# Altium PCB converter pcb.PcbDoc
Units mm, origin at the board's own origin, x right, y up, seen from the top; angles counter-clockwise.
Board outline 72 x 37 mm, 4 copper layers (Top Layer, Inner_GND, Inner_PWR, Bottom Layer), stack 1.471 mm thick; 21 components, 14 nets, 66 pads, 9 vias.
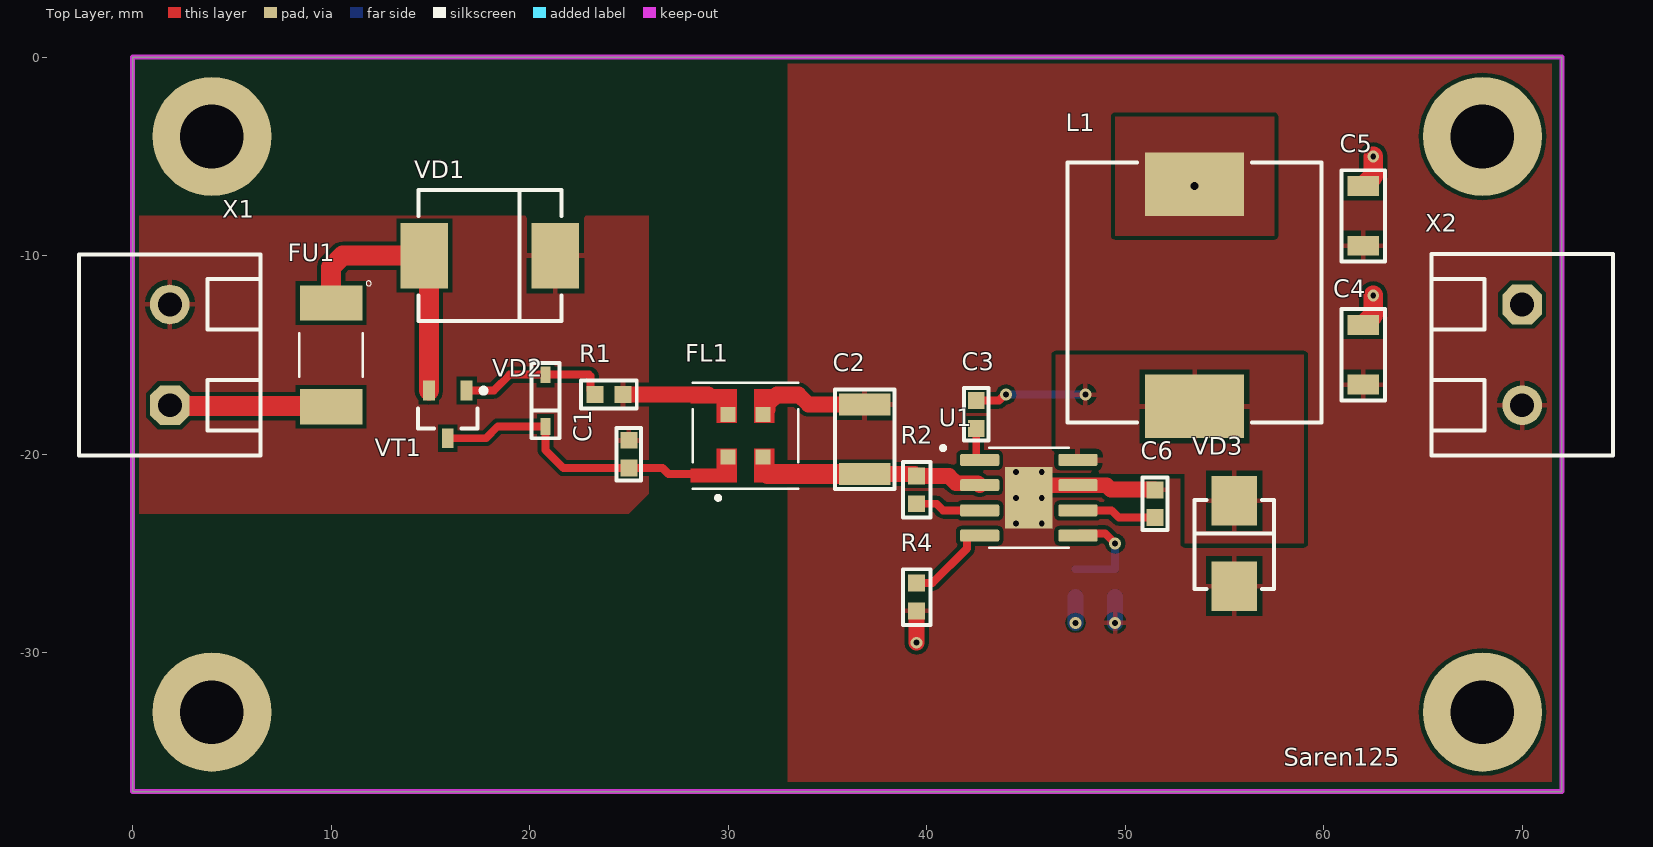
[diagram p0: Top Layer view]
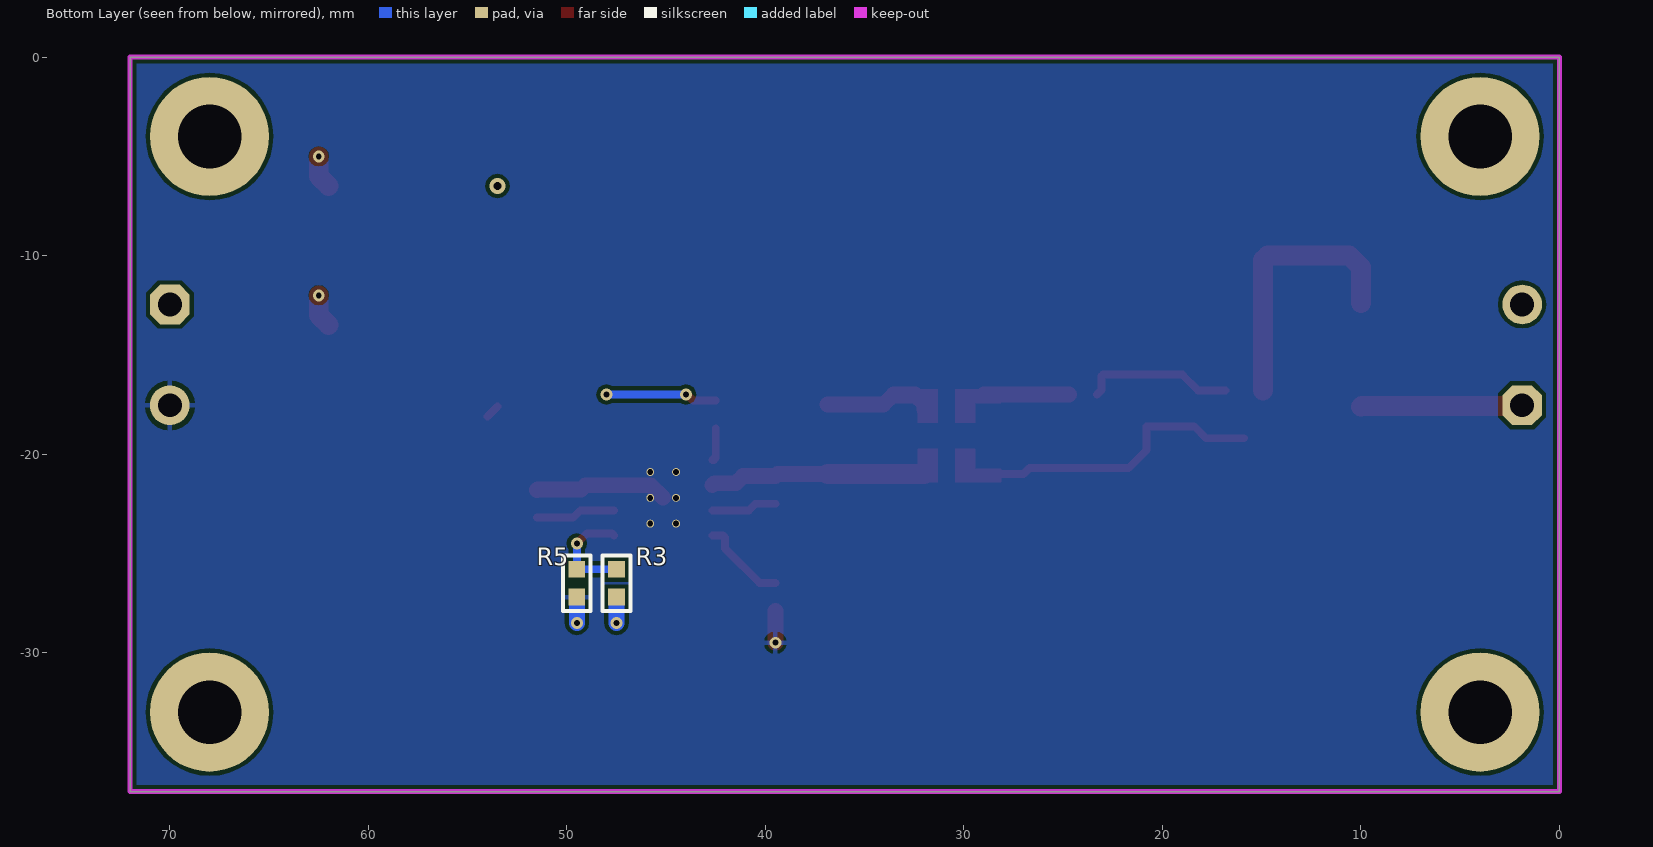
[diagram p1: Bottom Layer view, seen from below]
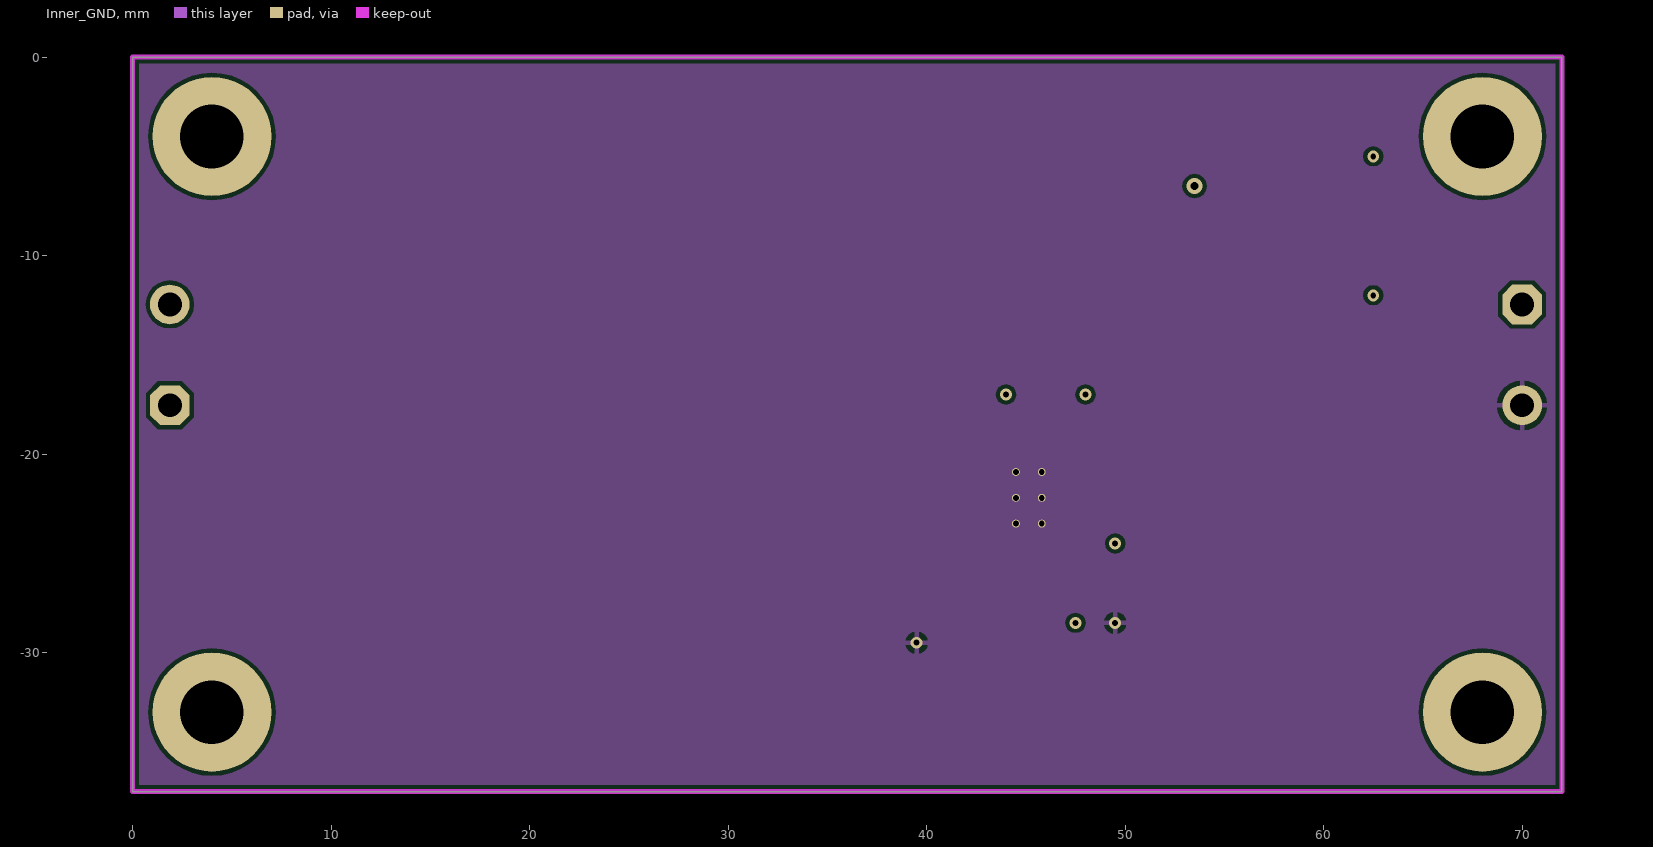
[diagram p2: Inner_GND]
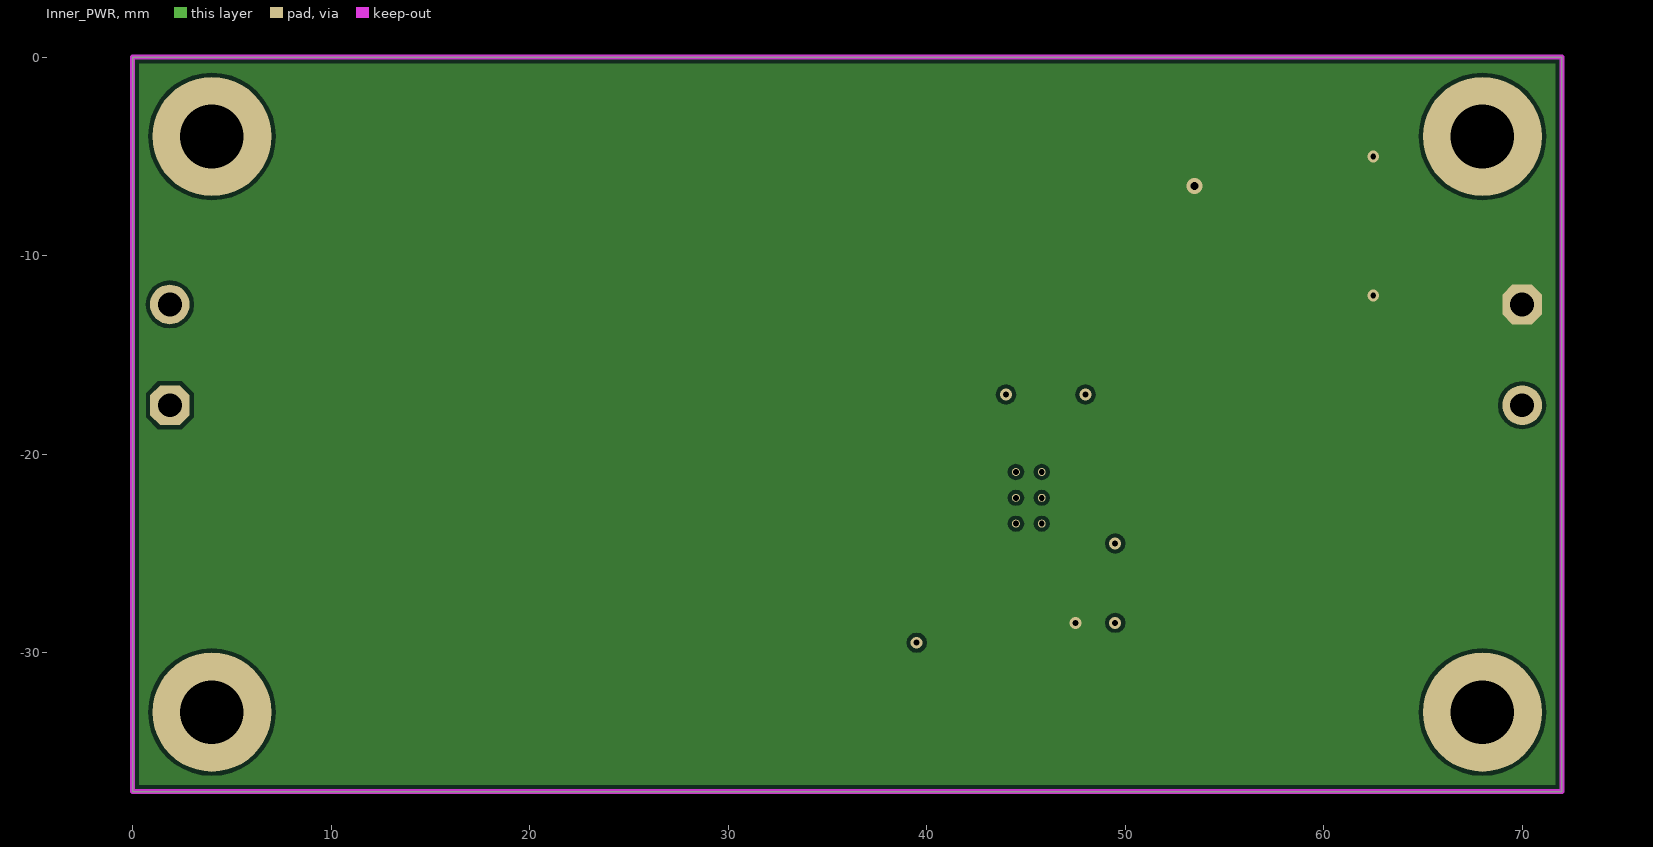
[diagram p3: Inner_PWR]
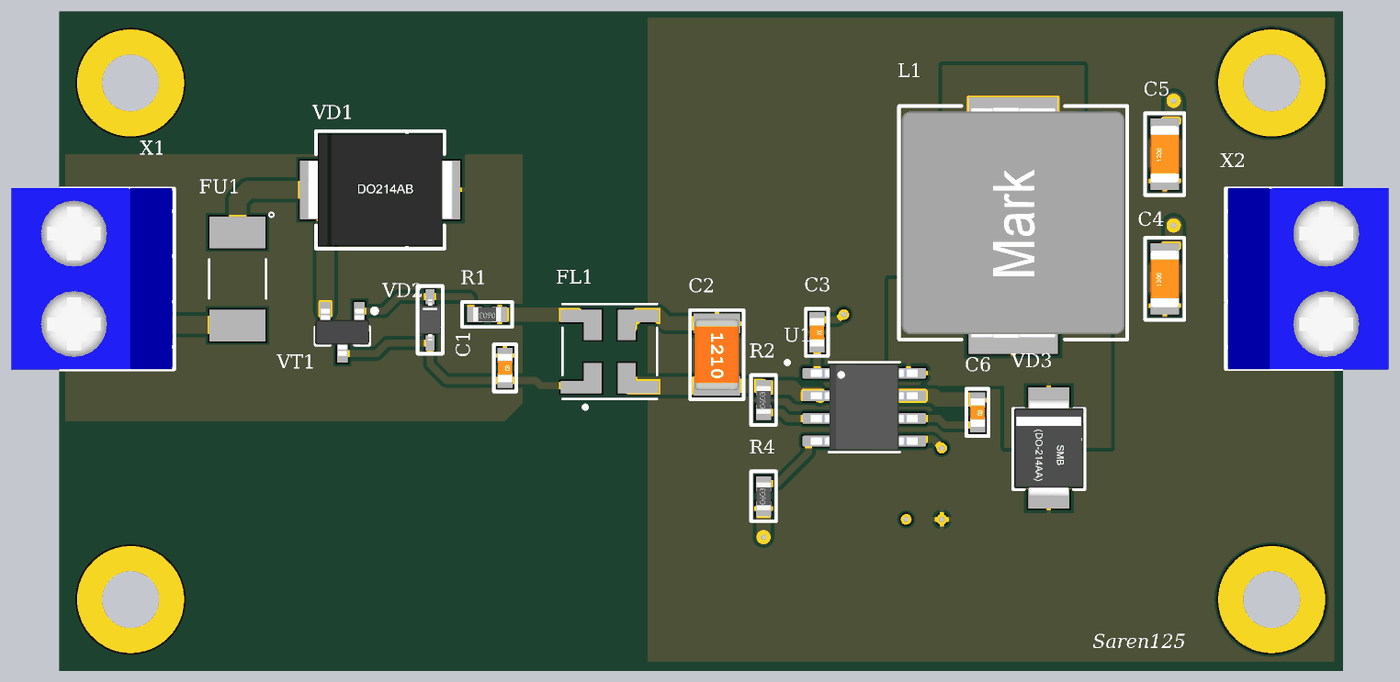
[diagram p4: 3D render of the assembled board from above, using the file's embedded part models]

## Layer stack, top to bottom
Top Solder: solder mask 0.0102, Solder Resist, Dk 3.5
Top Layer: signal copper 0.0356
Dielectric 2: prepreg 0.1651, PP-019, Dk 4.5
Inner_GND: signal copper 0.035
Dielectric 1: dielectric 1, FR-4, Dk 4.8
Inner_PWR: signal copper 0.035
Dielectric 3: prepreg 0.1651, PP-019, Dk 4.5
Bottom Layer: signal copper 0.0356
Bottom Solder: solder mask 0.0102, Solder Resist, Dk 3.5

## Board outline
0,-37 0,0 72,0 72,-37

## Design rules (kind name [scope] priority, off if disabled: settings)
Clearance Clearance_1 [All] p1: gap=0.2 ignorepadtopadclearanceinfootprint=FALSE
Clearance Clearance_power [InNetClass('Power')] p2: gap=0.3 ignorepadtopadclearanceinfootprint=FALSE
PolygonConnect thermalPad [InComponent('U1') AND InNet('GND_SYSTEM') OR InNet('+5V_PWR')] p1: connectstyle=Direct reliefconductorwidth=0.254 reliefentries=4 polygonreliefangle="90 Angle" airgapwidth=0.254
PolygonConnect [All] p2: connectstyle=Relief reliefconductorwidth=0.254 reliefentries=4 polygonreliefangle="90 Angle" airgapwidth=0.254
RoutingVias [All] p1: holewidth=0.3 width=0.6 viastyle="Through Hole" minholewidth=0.3 minwidth=0.6 maxholewidth=0.3 maxwidth=0.6
SolderMaskExpansion [All] p1: expansion=0.102 istentingtop=FALSE
Width Width_1 [InNetClass('net')] p1: maxlimit=0.4 minlimit=0.2 preferedwidth=0.25
Width [InNetClass('Power')] p2: maxlimit=3 minlimit=0.8 preferedwidth=1
30 further rules are at their usual default settings.

## Components (designator, comment, footprint, x,y, rotation, side; value= is the part's Value field where it differs from the comment)
C1 "Ceramic capacitor, 0.1μF 50V, X7R, ±10%, , 0603, -55...+125°C" "CAP: 0603" 25,-20 r270 top value="0.1μF 50V"
C2 "Ceramic capacitor, 10uF, X7R, ±10%, 50V, 1210, -55...+125°C" "CAP: 1210" 36.88,-19.25 r270 top value=10uF
C3 "Ceramic capacitor, 0.1μF 50V, X7R, ±10%, , 0603, -55...+125°C" "CAP: 0603" 42.5,-18 r270 top value="0.1μF 50V"
C4 "22uF 16V" CH1206C 62,-15 r90 top
C5 "22uF 16V" CH1206C 62,-8 r90 top
C6 "Ceramic capacitor, 10nF 50V, X7R, ±10%, , 0603, -55...+125°C" "CAP: 0603" 51.5,-22.5 r270 top value="10nF 50V"
FL1 "DLW5BTM102SQ2L" FIL_DLW5BTM102SQ2L 30.875,-19.075 r180 top
FU1 "1812L260/30MR" FUSM4632X200N 10,-15 r270 top
L1 "='='Fixed inductor'+', '+Value+', '+''+', '+'SRP1265A'+', '+'13.5A'+', '+'-40...+150°C''" "IND: SRP1265A" 53.5,-12 r270 top
R1 "10кОм" CH0603R 24,-17 r180 top
R2 "100кОм" CH0603R 39.5,-21.8 r90 top value=10кОм
R3 "100кОм" CH0603R 47.5,-26.5 r270 bottom value=10кОм
R4 "91кОм" CH0603R 39.5,-27.2 r90 top value=10кОм
R5 "17.8кОм" CH0603R 49.5,-26.5 r90 bottom value=10кОм
U1 "LMR14030SDDAR" SOIC127P600X170-9N 45.15,-22.2 r0 top
VD1 "SMCJ24A" SMC 18,-10 r0 top
VD2 "BZT52C12S" SOD323 20.8,-17.3 r270 top
VD3 "Schottky diode, 80V, 500mA, 1V, 15pF, SOD-123, -55...+150°C" "DIODE: SMB" 55.5,-24.5 r90 top
VT1 "AO3407A" SOT23_132 15.88,-18 r270 top
X1 "300-02P-5.08" "CON: 300-02P-5.08" 1.88,-15 r90 top
X2 "300-02P-5.08" "CON: 300-02P-5.08" 70,-15 r270 top

## Footprints (in the part's own frame and the unit in brackets; to place one, negate y for a bottom-side part, rotate by r counter-clockwise, add the part's x,y. Pads: shape width x height; smd on the part's side, far side on the other; paste and mask are expansions set on the pad)
"CAP: 0603" [mm]
  rect 0.85x0.85 smd: 1(-0.7,0) 2(0.7,0)
  silkscreen extent -1.33,-0.63 1.33,0.63, body extent -0.8,-0.4 0.8,0.4, height 0.3
"CAP: 1210" [mm]
  rect 1.1x2.6 smd: 1(-1.75,0) 2(1.75,0)
  silkscreen extent -2.5,-1.5 2.5,1.5, body extent -2,-1.24 2,1.24, height 1.7
CH0603R [mm]
  rect 0.85x0.85 smd: 1(-0.7,0) 2(0.7,0)
  silkscreen extent -1.4,-0.7 1.4,0.7, body extent -0.8,-0.4 0.8,0.4, height 0.44
CH1206C [mm] "Non polar chip capacitor, size 1206"
  rect 1x1.6 smd: 1(-1.5,0) 2(1.5,0)
  silkscreen extent -2.3,-1.1 2.3,1.1, body extent -1.6,-0.8 1.6,0.8, height 1
"CON: 300-02P-5.08" [mm] "2 pin 5.08mm screw connector"
  oct 2x2 hole 1.2: 1(-2.54,0)
  round 2 hole 1.2: 2(2.54,0)
  round 0.5 on Mech1: 14(-4.5,-3.9)
  silkscreen extent -5.08,-4.57 5.06,4.57, body extent -5.08,-4.44 5.08,4.56, height 12.5
"DIODE: SMB" [mm]
  rect 2.5x2.3 smd: 1(-2.15,0) 2(2.15,0)
  silkscreen extent -2.3,-2 2.2,2, body extent -2.75,-1.95 2.75,1.95, height 2.45
FIL_DLW5BTM102SQ2L [mm]
  rect 0.75x0.75 smd: 1(0.875,1.075) 2(-0.875,1.075) 3(-0.875,-1.075) 4(0.875,-1.075)
  Top Layer region: -0.45,0.65 -1.45,0.65 -1.45,1.65 -2.75,1.65 -2.75,2.35 -0.45,2.35
  Top Layer region: 1.45,-1.65 2.75,-1.65 2.75,-2.35 0.45,-2.35 0.45,-0.65 1.45,-0.65
  Top Layer region: 2.75,1.65 1.45,1.65 1.45,0.65 0.45,0.65 0.45,2.35 2.75,2.35
  Top Layer region: -0.45,-2.35 -2.75,-2.35 -2.75,-1.65 -1.45,-1.65 -1.45,-0.65 -0.45,-0.65
  silkscreen extent -2.65,-2.66 2.65,3.22
FUSM4632X200N [mm]
  rect 1.78x3.15 smd: 1(-2.615,0) 2(2.615,0)
  silkscreen extent -3.73,-1.6 1.1,2.03
"IND: SRP1265A" [mm]
  rect 3.2x5 smd: 1(-5.6,0) 2(5.6,0)
  silkscreen extent -6.7,-6.4 6.4,6.4, body extent -6.6,-6.25 6.3,6.25, height 6.31
SMC [mm]
  rect 2.4x3.3 smd: 1(-3.3,0) 2(3.3,0)
  silkscreen extent -3.6,-3.3 3.6,3.3, body extent -4.06,-3.15 4.06,3.15, height 2.67
SOD323 [mm]
  rect 0.85x0.5 smd: 1(-1.3,0) 2(1.3,0)
  round 0.5 on Mech1: 5(0.7,0.2)
  silkscreen extent -1.9,-0.7 1.9,0.7, body extent -1.15,-0.6 1.15,0.6, height 1.04
SOIC127P600X170-9N [mm]
  rrect25% 1.97x0.6 smd paste+0 mask+0.102: 1(-2.475,1.905) 2(-2.475,0.635) 3(-2.475,-0.635) 4(-2.475,-1.905) 5(2.475,-1.905) 6(2.475,-0.635) 7(2.475,0.635) 8(2.475,1.905)
  rect 2.4x3.1 smd paste-3 mask+0: 9(0,0)
  round 0.4 hole 0.3 mask+0.102: V1(-0.65,1.3) V2(0.65,1.3) V3(-0.65,0) V4(0.65,0) V5(-0.65,-1.3) V6(0.65,-1.3)
  silkscreen extent -4.42,-2.52 2,2.6, body extent -3,-2.45 3,2.45, height 1.7
SOT23_132 [mm] "SOT23, 3-Leads, Body 3,0x2,6mm (max), Pitch 0,95mm, IPC Medium Density"
  rect 1x0.6 smd: 1(-1.2,0.95) 2(-1.2,-0.95) 3(1.2,0)
  round 0.5 on Mech1: ""(-0.9,1.1)
  silkscreen extent -1.32,-1.5 0.7,1.92, body extent -1.32,-1.52 1.32,1.52, height 1.12

## Part data
C1 C3 C6: library part Ceramic_0603, Manufacturer=Yageo, Package=0603, PartNumber=CC0603KRX7R7BB104, Temperature=-55...+125°C, Tolerance=±10%, TypeCapacitor="Ceramic capacitor", TypeDielectric=X7R, HelpURL=https://www.digikey.com/product-detail/en/yageo/CC0603KRX7R7BB104/311-1088-1-ND/302998
  C1 C3: ValueManufacturerPartNumber="Ceramic capacitor, 0.1μF 50V, X7R, ±10%, , 0603, -55...+125°C"
  C6: ValueManufacturerPartNumber="Ceramic capacitor, 10nF 50V, X7R, ±10%, , 0603, -55...+125°C"
C2: library part Ceramic_1210, Manufacturer=Yageo, Package=1210, PartNumber=CC1210KKX7R9BB104, Temperature=-55...+125°C, Tolerance=±10%, TypeCapacitor="Ceramic capacitor", TypeDielectric=X7R, Voltage=50V, HelpURL=https://www.digikey.com/product-detail/en/yageo/CC1210KKX7R9BB104/311-4522-1-ND/8025611, ValueManufacturerPartNumber="Ceramic capacitor, 10uF, X7R, ±10%, 50V, 1210, -55...+125°C"
C4 C5: library part Capacitor
FL1: "2 Line Common Mode Choke Surface Mount 1 kOhms @ 100MHz 2A DCR 34mOhm", Package="Horizontal-6 Murata", Availability=Unavailable, MF=Murata, MP=DLW5BTM102SQ2L, Price=None, SnapEDA_Link=https://www.snapeda.com/parts/DLW5BTM102SQ2L/Murata/view-part/4300900/?ref=snap
FU1: library part 1812L110PRT, "PTC Resettable Fuse 1.1A(hold) 1.95A(trip) 33VDC 20A 0.8W 0.5s 0.06Ohm SMD Solder Pad 1812 T/R", Package=None, Availability=Unavailable, MP=1812L110PRT, Price=None
L1: library part Inductor_SRP1265A, Manufacturer=Bourns, MaxCurrent=13.5A, Package=SRP1265A, PartNumber=SRP1265A-4R7M, Temperature=-40...+150°C, TypeInductor="Fixed inductor", ValueManufacturerPartNumber="='Fixed inductor'+', '+Value+', '+''+', '+'SRP1265A'+', '+'13.5A'+', '+'-40...+150°C'", HelpURL=https://www.digikey.com/product-detail/en/bourns-inc/SRP1265A-4R7M/SRP1265A-4R7MCT-ND/4876721, SRP1265A-150M=15μH
R1 R2 R3 R4 R5: library part Resistor
U1: "SIMPLE SWITCHERÂ® 40-V, 3.5-A, 2.2-MHz step-down converter with 40-uA IQ", Package="HSOIC-8 Texas Instruments", Check_prices=https://www.snapeda.com/parts/LMR14030SDDAR/Texas+Instruments/view-part/?ref=eda, MF="Texas Instruments", MP=LMR14030SDDAR, SnapEDA_Link=https://www.snapeda.com/parts/LMR14030SDDAR/Texas+Instruments/view-part/?ref=snap
VD1: library part TVS-diod
VD2: library part "Diod Zener"
VD3: library part Schottky_single, Current=500mA, Manufacturer="Diodes Incorporated", Package=SOD-123, PartNumber=SK56B, Temperature=-55...+150°C, Voltage=80V, VoltageDrop=1V, HelpURL=https://www.digikey.com/product-detail/en/diodes-incorporated/MBR0580S1-7/MBR0580S1-7DICT-ND/5080371, RecoveryTime=15pF, TypeDiode="Schottky diode", ValueManufacturerPartNumber="Schottky diode, 80V, 500mA, 1V, 15pF, SOD-123, -55...+150°C"
VT1: library part P-chanel, "Mosfet"
X1 X2: library part 2-Connector

## Free pads (board coordinates)
  round 6 hole 3.2: ""(4,-33) ""(4,-4) ""(68,-33) ""(68,-4)

## Via types
v1: diameter 0.6, hole 0.3, Top Layer to Bottom Layer, 8 vias
v2: diameter 0.8, hole 0.4, Top Layer to Bottom Layer, 1 vias

## Nets (pads, with @x,y where several pads share a name; then routed paths per layer and width w, separated by ;. In a path a pad name is that pad's centre, name@x,y a point inside that pad or via, vN(x,y) a via of type N, cw(c..) or ccw(c..) an arc to the next point about the centre after c; other vN are vias at no path point)
+5V_PWR: C4.2 C5.2 L1.1 R3.2 X2.1 | length 4.7
  Top Layer w1: C4.2 62.5,-13 v1(62.5,-12) ; C5.2 62.5,-6 v1(62.5,-5)
  Bottom Layer w0.8: v1(47.5,-28.5) R3.2
  other v2: 53.5,-6.5
+24V_EMI: C2.2 FL1.2 R2.2 U1.2 | length 10.9
  Top Layer w0.8: C2.2 39.4,-21 R2.2 41.125,-21.1 41.49,-21.465 42.575,-21.465 U1.2
  Top Layer w1: 32,-21 C2.2
+24V_IN: FU1.2 X1.1 | length 8.2
  Top Layer w1: X1.1 1.918,-17.578 9.962,-17.578 FU1.2
+24V_IN_FUSED: FU1.1 VD1.1 VT1.2 | length 13.6
  Top Layer w1: FU1.1 10,-10.586 10.586,-10 VD1.1 14.93,-10.23 VT1.2
GND_IN: C1.1 FL1.4 R1.1 VD1.2 X1.2 | length 4.3
  Top Layer w0.8: R1.1 29,-17
GND_SYSTEM: C2.1 C4.1 C5.1 C6.1 FL1.3 R4.1 R5.1 U1.7 U1.9 U1.V1 U1.V2 U1.V3 U1.V4 U1.V5 U1.V6 VD3.1 X2.2 | length 15.5
  Top Layer w0.8: FL1.3 32,-17.75 32,-17.469 32.469,-17 33.55,-17 34.05,-17.5 C2.1 ; v1(39.5,-29.5) R4.1 ; U1.9 45.785,-21.565 49.065,-21.565 49.283,-21.782 51.483,-21.782 C6.1
  Bottom Layer w0.8: v1(49.5,-28.5) R5.1
NetC1_2: C1.2 FL1.1 VD2.2 VT1.3 | length 16.8
  Top Layer w0.4: VT1.3 17.8,-19.2 18.4,-18.6 VD2.2 20.8,-19.8 21.7,-20.7 C1.2 26.7,-20.7 27,-21 29.766,-21 29.825,-20.941 29.825,-20.325 FL1.1
NetC3_1: C3.1 L1.2 U1.8 VD3.2 | length 6.3
  Top Layer w0.4: C3.1 43.646,-17.3 43.946,-17 v1(44,-17) ; L1.2 L1.2@54,-18.1
  Bottom Layer w0.4: v1(44,-17) v1(48,-17)
NetC3_2: C3.2 U1.1 | length 1.9
  Top Layer w0.4: C3.2 42.5,-20.195 42.6,-20.295 U1.1 U1.1@42.575,-20.195
NetC6_2: C6.2 U1.6 | length 4
  Top Layer w0.4: U1.6 49.324,-22.835 49.689,-23.2 C6.2
NetR1_2: R1.2 VD2.1 VT1.1 | length 7.6
  Top Layer w0.4: VT1.1 18.2,-16.8 19,-16 20,-16 VD2.1 23,-16 23.075,-16.075 23.075,-16.775 R1.2
NetR2_1: R2.1 U1.3 | length 3.3
  Top Layer w0.4: R2.1 40.5,-22.5 40.835,-22.835 U1.3
NetR3_1: R3.1 R5.2 U1.5 | length 5.4
  Top Layer w0.4: U1.5 47.725,-24.005 48.639,-24.005 48.644,-24 49,-24 v1(49.5,-24.5)
  Bottom Layer w0.4: R3.1 R5.2 v1(49.5,-24.5)
NetR4_2: R4.2 U1.4 | length 4.5
  Top Layer w0.4: R4.2 39.511,-26.489 40.291,-26.489 42.03,-24.75 42.03,-24.205 42.13,-24.105 U1.4
pads on no net: VD2.5 VT1. X1.14 X2.14

## Polygon pours and split planes (outlines as drawn)
GND_SYSTEM on Top Layer "GND_SYSTEM_L01_P023" (solid, remove dead copper, pour order 23): 33,0 71.5,0 71.5,-36.5 71,-36.5 33,-36.5
NetC3_1 on Top Layer "NETC3_1_L01_P021" (solid, pour order 21): 46.5,-15 59,-15 59,-24.5 53,-24.5 53,-21 46.5,-21 46.5,-19.5
+5V_PWR on Top Layer "+5V_PWR_L01_P017" (solid, pour order 17): 49.5,-3 49.5,-9 57.5,-9 57.5,-3
no net on Top Layer "NONET_L01_P022" (solid, pour order 22): 47.25,-19.5
no net on Top Layer "NONET_L01_P020" (solid, pour order 20): 44.5,-18
no net on Top Layer "NONET_L01_P019" (solid, pour order 19): 45,-15
no net on Top Layer "NONET_L01_P015" (solid, pour order 15): 42,-5.5
GND_IN on Top Layer "GND_IN_L01_P007" (solid, pour order 7): 0,-8 26,-8 26,-22 25,-23 0,-23
GND_IN on Top Layer "GND_IN_L01_P009" (solid, pour order 9): 36,0
GND_IN on Top Layer "GND_IN_L01_P006" (solid, pour order 6): 0,-10
no net on Top Layer "NONET_L01_P003" (solid, pour order 3): 12,-24
no net on Top Layer "NONET_L01_P000" (solid, pour order 0): 0,-9
+5V_PWR on Inner_PWR "+5V_PWR_L03_P011" (solid, pour order 11): 0,0 72,0 72,-37 0,-37
GND_SYSTEM on Inner_GND "GND_SYSTEM_L02_P008" (solid, pour order 8): 0,0 72,0 72,-37 0,-37
GND_SYSTEM on Bottom Layer "GND_SYSTEM_L04_P013" (solid, pour order 13): 72,0 0,0 0,-37 72,-37

## Keep-outs
Keep-Out Layer:
  the board outline again, w0.254

## Other copper
Top Layer:
  pour cut-out: 35,0
Inner_GND:
  pour cut-out: 8,-7

## Silkscreen, mask and mechanical layers (free items; w line width, h text height)
Top Overlay:
  text "Saren125" at 58,-36 h1.52